# Altium PCB PCB1.PcbDoc
Units mil, origin at the board's own origin, x right, y up, seen from the top; angles counter-clockwise.
Board outline 3915 x 3520 mil, 4 copper layers (Top Layer, Layer 1, Layer 2, Bottom Layer), stack 23.756 mil thick; 28 components, 11 nets, 71 pads, 833 vias.
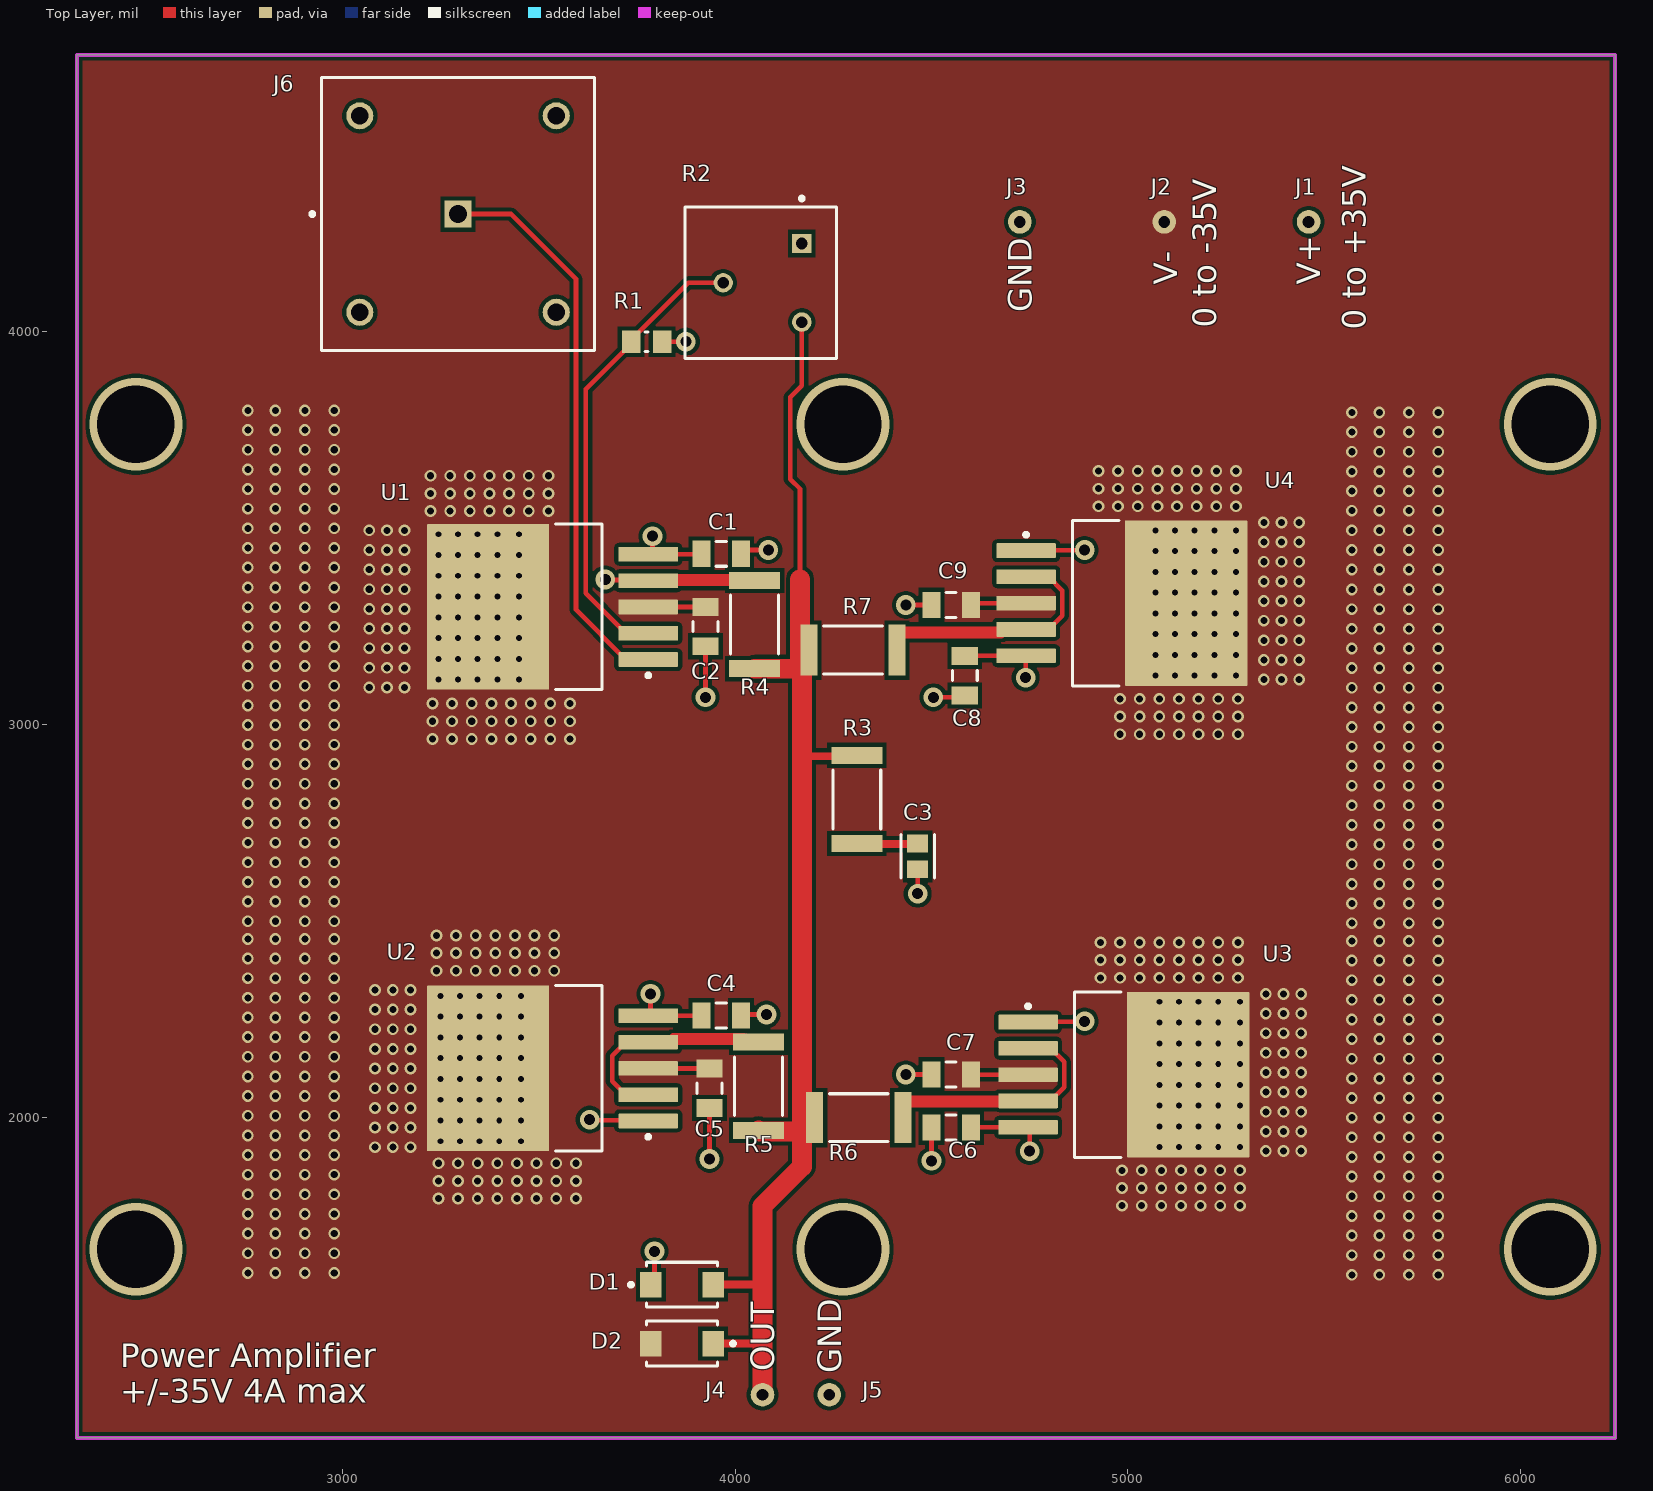
[diagram p0: Top Layer view]
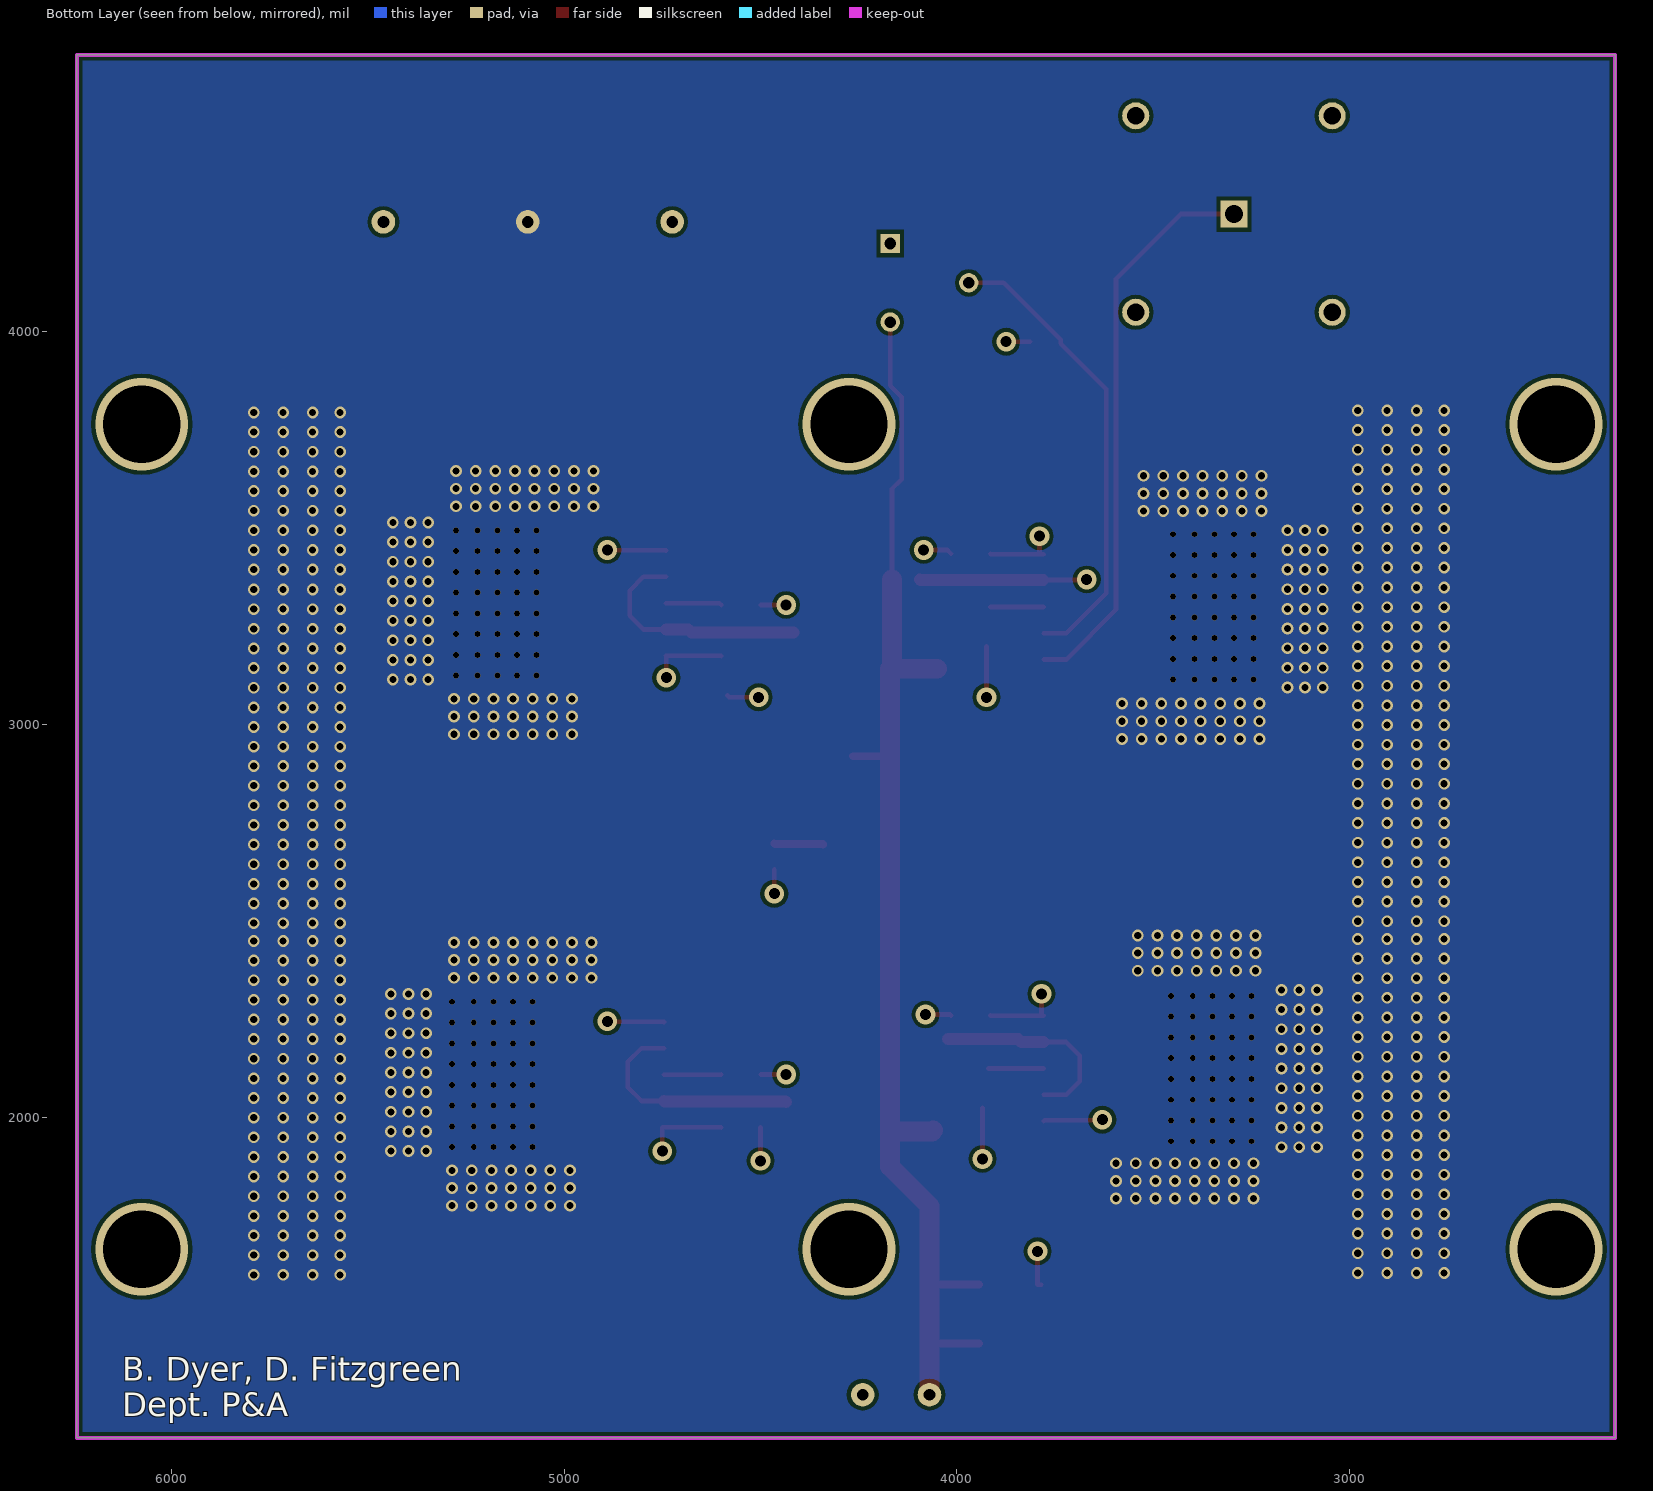
[diagram p1: Bottom Layer view, seen from below]
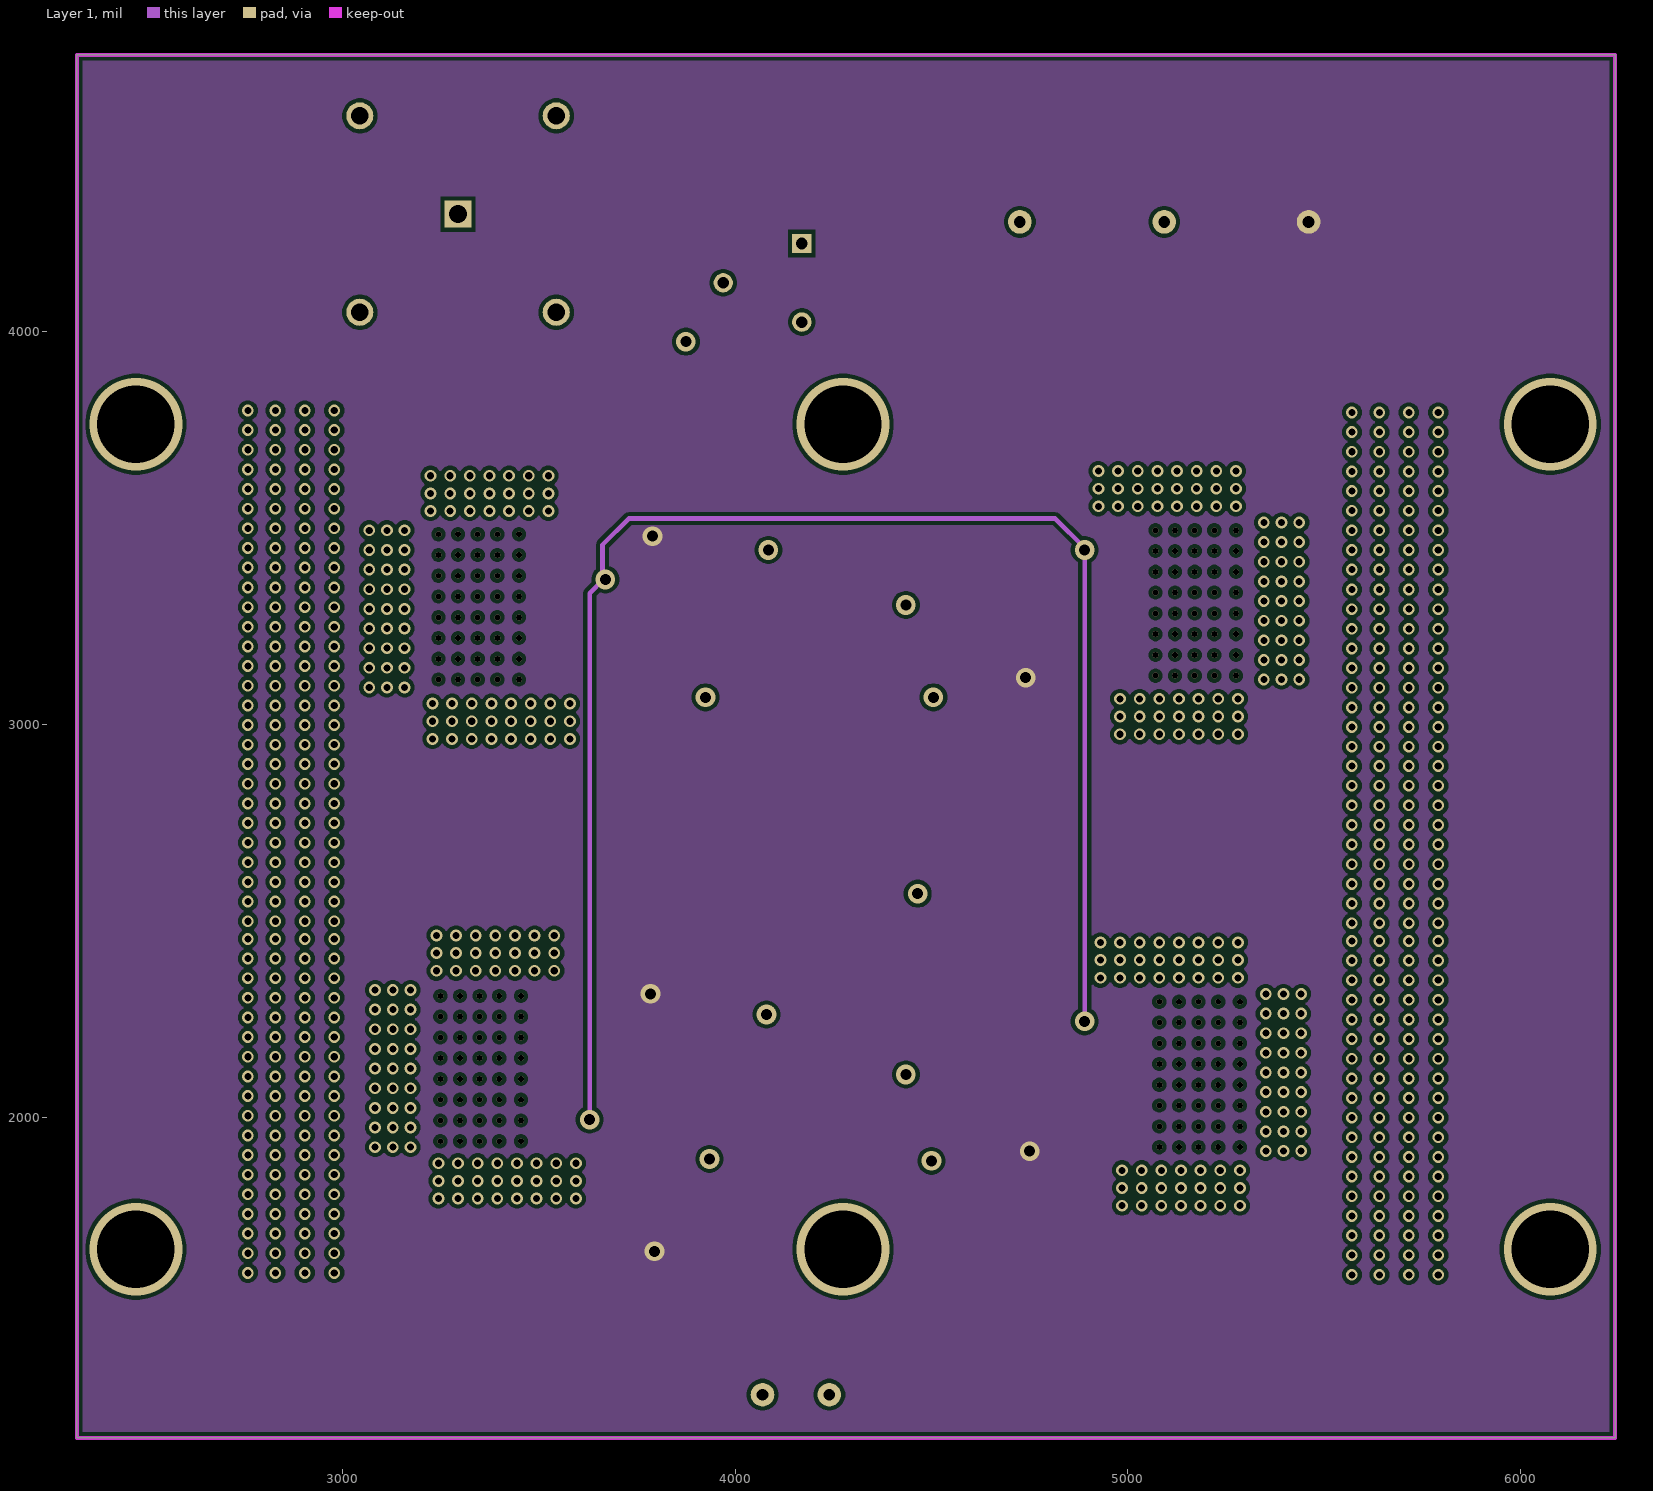
[diagram p2: Layer 1]
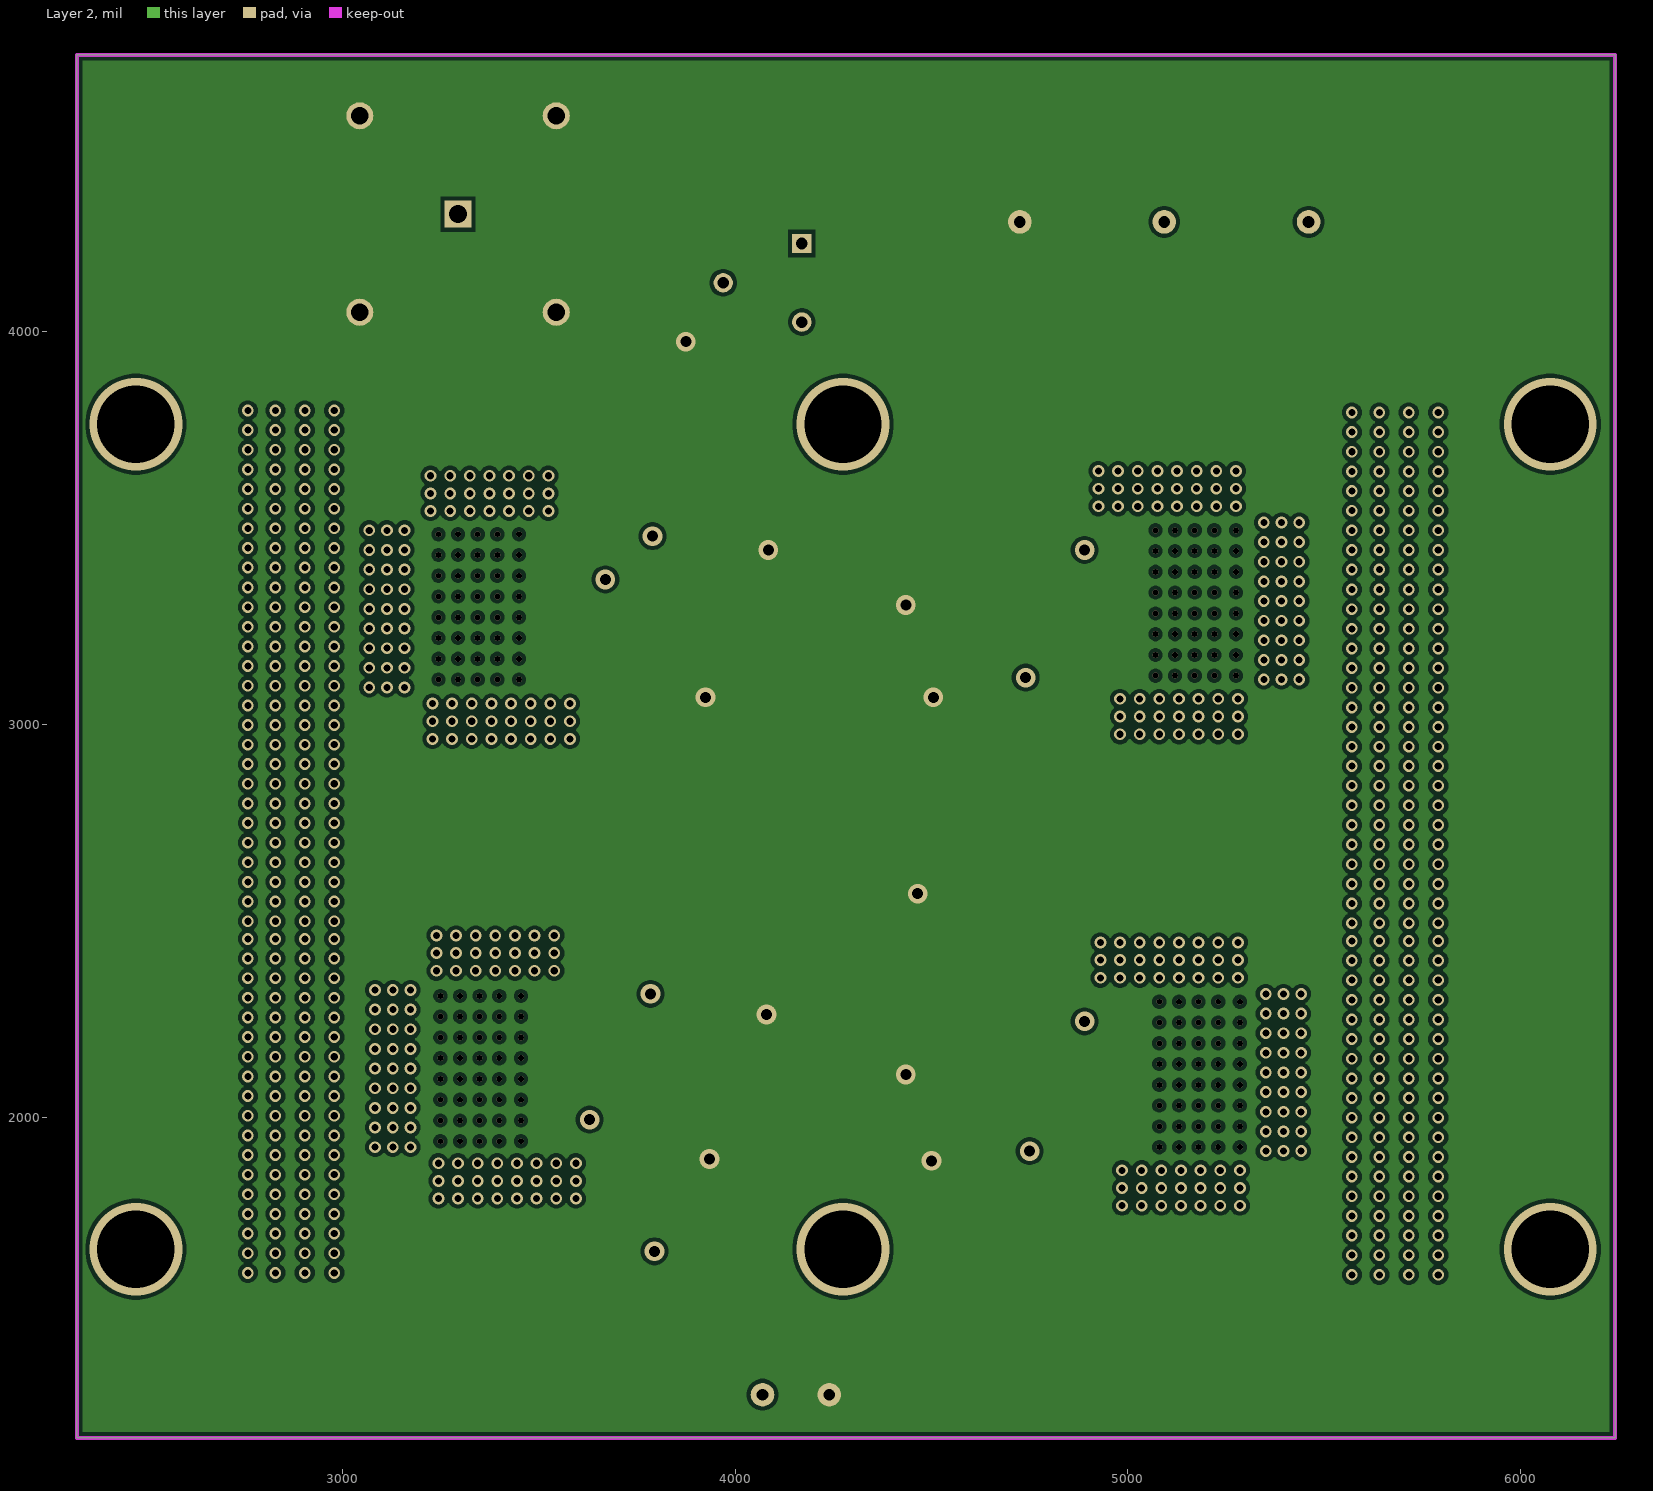
[diagram p3: Layer 2]
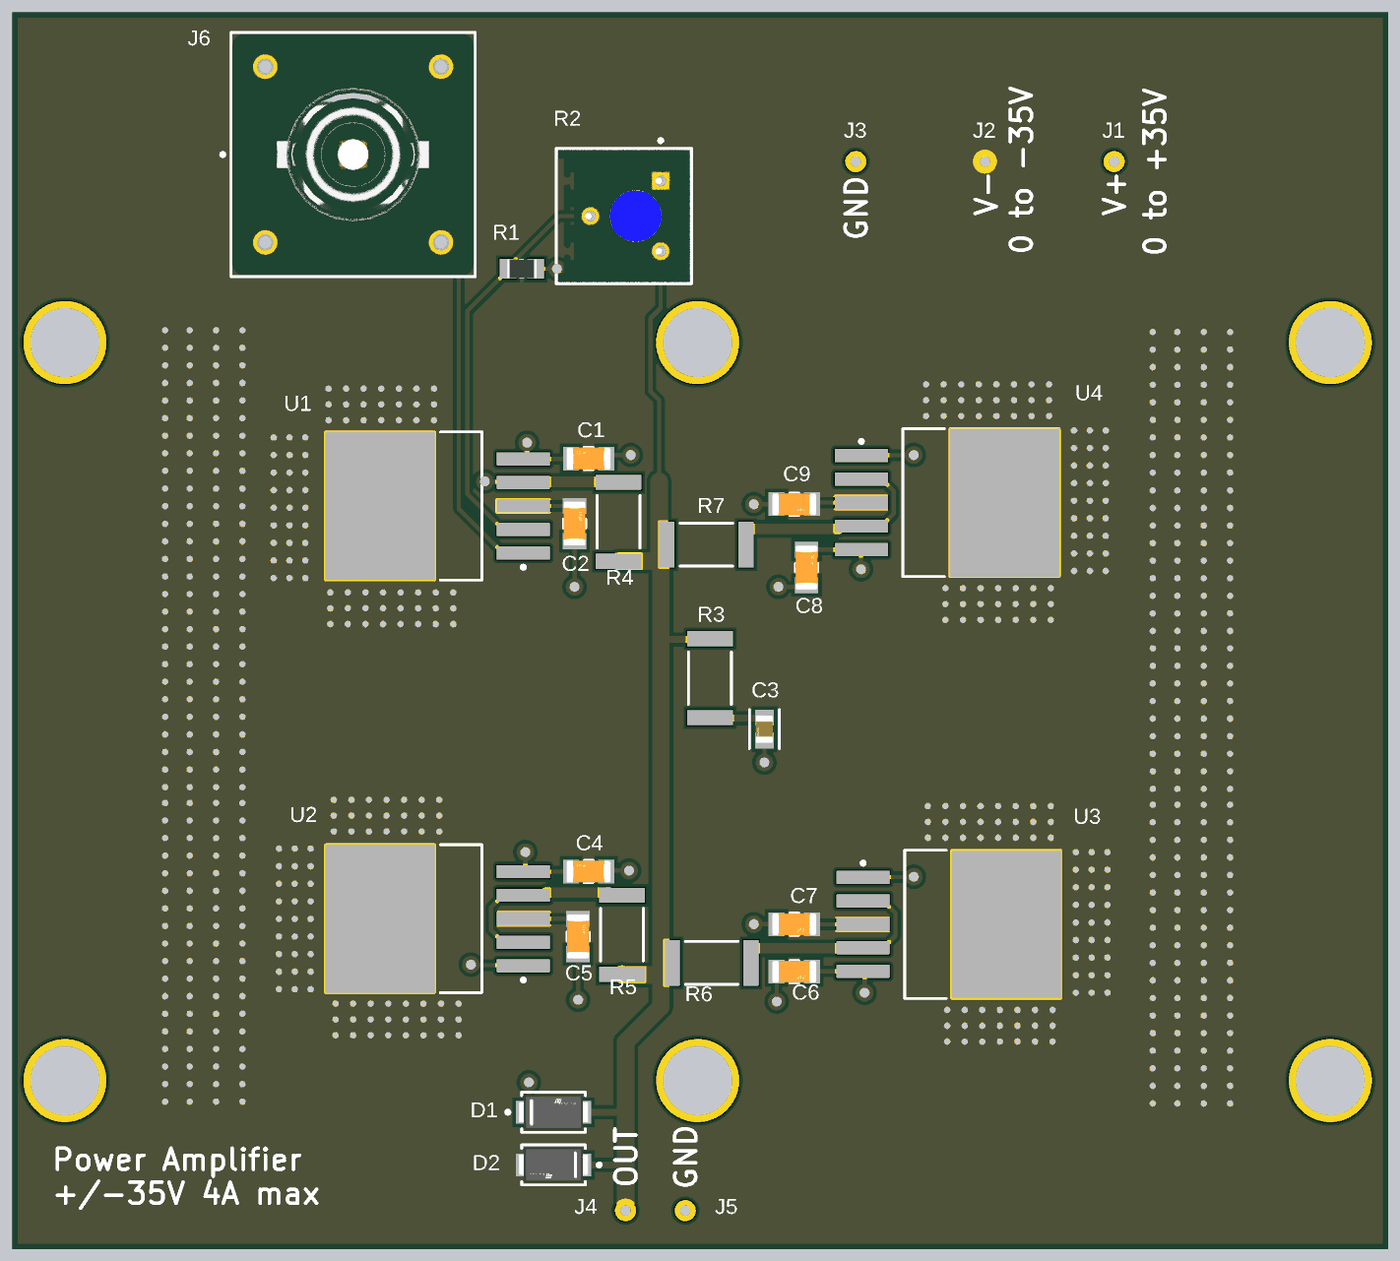
[diagram p4: 3D render of the assembled board from above, using the file's embedded part models]

## Layer stack, top to bottom
Top Solder: solder mask 0.4, Solder Resist, Dk 3.5
Top Layer: signal copper 1.4
Dielectric 2: prepreg 2.8, PP-006, Dk 4.1
Layer 1: signal copper 1.378
Dielectric 1: dielectric 12.6, FR-4, Dk 4.8
Layer 2: signal copper 1.378
Dielectric 3: prepreg 2.8, PP-006, Dk 4.1
Bottom Layer: signal copper 1.4
Bottom Solder: solder mask 0.4, Solder Resist, Dk 3.5

## Board outline
2325,1185 2325,4705 6240,4705 6240,1185

## Design rules (kind name [scope] priority, off if disabled: settings)
Clearance [All] p1: gap=10 ignorepadtopadclearanceinfootprint=FALSE except(0: Arc-Hole Track-Hole SMDPad-Hole THPad-Hole Via-Hole Fill-Hole Poly-Hole Region-Hole Text-Hole)
HoleSize [All] p1: absolutevalues=TRUE maxlimit=100 minlimit=14 maxpercent=80.000 minpercent=20.000
PolygonConnect [All] p1: connectstyle=Direct reliefconductorwidth=10 reliefentries=4 polygonreliefangle="90 Angle" airgapwidth=10
RoutingVias [All] p1: holewidth=28 width=50 viastyle="Through Hole" minholewidth=15 minwidth=15 maxholewidth=196.85 maxwidth=236.22
SolderMaskExpansion [All] p1: expansion=4 istentingtop=FALSE
Width [All] p1: maxlimit=100 minlimit=10 preferedwidth=12 minimp=50.000000 maximp=50.000000 favimp=50.000000
29 further rules are at their usual default settings.

## Components (designator, comment, footprint, x,y, rotation, side; value= is the part's Value field where it differs from the comment)
C1 "10u 50V" FP-CL31-IPC_C 3965,3435 r0 top value=10uF
C2 "10u 50V" FP-CL31-IPC_C 3925,3250 r270 top value=10uF
C3 "10n, 50V" FP-GRM219-0_1-IPC_B 4465,2665 r270 top
C4 "10u 50V" FP-CL31-IPC_C 3965,2260 r0 top value=10uF
C5 "10u 50V" FP-CL31-IPC_C 3935,2075 r270 top value=10uF
C6 "10u 50V" FP-CL31-IPC_C 4550,1975 r180 top value=10uF
C7 "10u 50V" FP-CL31-IPC_C 4550,2110 r180 top value=10uF
C8 "10u 50V" FP-CL31-IPC_C 4585,3125 r270 top value=10uF
C9 "10u 50V" FP-CL31-IPC_C 4550,3305 r180 top value=10uF
D1 "STPS1H100A" FP-SMA-MFG 3865,1575 r0 top
D2 "STPS1H100A" FP-SMA-MFG 3865,1425 r180 top
J1 "Banana" PCBComponent_1 5460,4280 r0 top
J2 "Banana" PCBComponent_1 5092.5,4280 r0 top
J3 "Banana" PCBComponent_1 4725,4280 r0 top
J4 "Banana" PCBComponent_1 4070,1295 r180 top
J5 "Banana" PCBComponent_1 4240,1295 r180 top
J6 "5227699-1" FP-5227699-1-MFG 3295,4300 r0 top
R1 "1K" RESC2013X60X35ML10T20 3775,3975 r180 top
R2 "30k" FP-3386F-MFG 4065.47,4125 r270 top value=30kΩ
R3 "3W" RESC6332 4310,2810 r90 top value=1R
R4 "3W" RESC6332 4050,3255 r270 top value=1R
R5 "3W" RESC6332 4060,2080 r270 top value=1R
R6 "3W" RESC6332 4315,2000 r180 top value=1R
R7 "3W" RESC6332 4300,3190 r180 top value=1R
U1 "OPA544F/500" KTT0005A_L 3535,3300 r180 top
U2 "OPA544F/500" KTT0005A_L 3535,2125.43 r180 top
U3 "OPA544F/500" KTT0005A_L 4990,2109.57 r0 top
U4 "OPA544F/500" KTT0005A_L 4985,3309.57 r0 top

## Footprints (in the part's own frame and the unit in brackets; to place one, negate y for a bottom-side part, rotate by r counter-clockwise, add the part's x,y. Pads: shape width x height; smd on the part's side, far side on the other; paste and mask are expansions set on the pad)
FP-3386F-MFG [mm]
  rect 1.25x1.25 hole 0.75 paste-1000 mask+0: 1(-2.54,2.655)
  round 1.25 hole 0.75 paste-1000 mask+0: 2(0,-2.425) 3(2.54,2.655)
  silkscreen extent -5.57,-4.89 4.89,4.89, body extent -4.99,-4.99 4.99,4.99, height 0.25
FP-5227699-1-MFG [mm]
  rect 1.75x1.75 hole 1.15 paste-1000 mask+0: 1(0,0)
  round 1.75 hole 1.15 paste-1000 mask+0: 2(-6.35,6.35) 3(6.35,6.35) 4(-6.35,-6.35) 5(6.35,-6.35)
  silkscreen extent -9.55,-8.82 8.82,8.82, body extent -8.93,-8.93 8.93,8.93, height 0.25
FP-CL31-IPC_C [mil]
  rect 45.45x67.17 smd paste+0 mask+0: 1(-50.23,0) 2(50.23,0)
  silkscreen extent -13,-31 13,31, body extent -77,-39 77,39, height 10
FP-GRM219-0_1-IPC_B [mil]
  rect 45.58x53.63 smd paste+0 mask+0: 1(-32.57,0) 2(32.57,0)
  silkscreen extent -55,-43 55,43, body extent -65,-37 65,37, height 10
FP-SMA-MFG [mm]
  rect 1.4x1.64 smd paste+0 mask+0: 1(-2.015,0) 2(2.015,0)
  silkscreen extent -3.42,-1.45 2.3,1.45, body extent -2.82,-1.55 2.82,1.55, height 0.25
KTT0005A_L [mm] "DPAK, 5-Leads, Body 10.65x9.65mm, Pitch 1.7mm, IPC High Density"
  rrect11% 3.85x0.95 smd: 1(-6.2,3.4) 2(-6.2,1.7) 3(-6.2,0) 4(-6.2,-1.7) 5(-6.2,-3.4)
  rrect1% 7.9x10.7 smd: 6(4.15,0)
  silkscreen extent -6.33,-5.35 -0.2,5.35, body extent -3.2,-5.32 6.45,5.33, height 4.83
PCBComponent_1 [mil]
  round 60 hole 30: 1(0,0)
RESC2013X60X35ML10T20 [mm] "Chip Resistor, 2-Leads, Body 2.1x1.35mm, IPC Low Density"
  rect 1.2x1.45 smd: 1(-1,0) 2(1,0)
  silkscreen extent -0.1,-0.63 0.1,0.63, body extent -1.05,-0.68 1.05,0.67, height 0.6
RESC6332 [mm] "Chip Resistor, Body 6.3x3.2mm, IPC High Density"
  rect 1.1x3.3 smd: 1(-2.85,0) 2(2.85,0)
  silkscreen extent -1.9,-1.55 1.9,1.55, body extent -3.22,-1.68 3.22,1.68, height 0.9

## Part data
C1 C2 C4 C5 C6 C7 C8 C9: library part CMP-13271-000016-1, "CAP CER 10UF 50V X5R 1206", Capacitance=10uF, Manufacturer=Samsung, Manufacturer Part Number=CL31A106KBHNNNE, Package=CL31, Temperature="-55°C to +85°C", Temperature Characteristic=X5R, Temperature Coefficient=15%, Temperature Range High=+85°C, Temperature Range Low=-55°C, Tolerance=10%, Voltage=50V, Automotive=No, Category=Cap, ComponentLink2Description=Datasheet, ComponentLink2URL=http://www.samsungsem.com/kr/support/product-search/mlcc/__icsFiles/afieldfile/2018/06/21/CL31A106KBHNNNE.pdf, Device Class L1="Passive Components", Device Class L2=Capacitors, Device Class L3="Ceramic Capacitors", Digikey Description="CAP CER 10UF 50V X5R 1206", Height=1.8mm, Ipc Land Pattern Name=CAPC320160X160, Lead Free=Yes, Material=Ceramic, Octopart=https://octopart.com/cl31a106kbhnnne-samsung-19832778, RoHS=TRUE, Voltage Rating=50V
C3: library part CMP-2007-00135-2, "Chip Multilayer Ceramic Capacitors for General Purpose, 0805, 10000pF, C0G, 30ppm/°C, 5%, 50V", Capacitance=10nF, Case Code (Imperial)=0805, Case Code (Metric)=2012, Dielectric=C0G, Dielectric Material=Ceramic, Insulation Resistance=10GR, Max Operating Temperature=125°C, Min Operating Temperature=-55°C, Package Quantity=1, Temperature Coefficient=30ppm/°C, Tolerance=5%, Voltage=50V, Case/Package=0805, Depth=1.25mm, Height=0.85mm, Lead Free="Lead Free", Length=2mm, Material=Ceramic, Mount="Surface Mount", Number of Pins=2, Packaging="Tape and Reel", Radiation Hardening=No, REACH SVHC="No SVHC", Termination=SMD/SMT, Thickness=0.037inch, Voltage Rating=50V, Voltage Rating (DC)=50V, Width=0.049inch
D1 D2: library part CMP-2000-07173-2, "DIODE SCHOTTKY 100V 1A SMA", Forward Current=1A, Manufacturer=STMicroelectronics, Max Junction Temp=+175°C, Max Repetitive Reverse Voltage=100V, Max Surge Forward Current=50A, Package=SMA, Peak Reverse Current=4uA, Temperature="to +175°C", Automotive=No, Category=Diode, ComponentLink2Description=Datasheet, ComponentLink2URL=https://www.st.com/resource/en/datasheet/stps1h100.pdf, Device Class L1="Discrete Semiconductors", Device Class L2=Diodes, Device Class L3="Schottky Diodes", Digikey Description="DIODE SCHOTTKY 100V 1A SMA", Height=2.65mm, Lead Free=Yes, Manufacturer Part Number=STPS1H100A, Mouser Description="Schottky Diodes & Rectifiers 1.0 Amp 100 Volt", Octopart=https://octopart.com/stps1h100a-stmicroelectronics-55399361, RoHS=TRUE, Standoff Height=0.05mm, Temperature Range High=+175°C
J1 J2 J3 J4 J5: library part Component_1
J6: library part CMP-03357-000003-1, "CONN BNC JACK STR 50 OHM PCB", Frequency=4GHz, Insulation Resistance=5GR, Max Operating Temperature=85°C, Min Operating Temperature=-55°C, Package Quantity=30, Voltage Rating=500V, Body Material=Zinc, Body Plating=Nickel, Connector Type=BNC, Contact Material=Bronze, Contact Plating=Silver, Depth=17.45mm, ELV=Compliant, Fastening Type=Bayonet, Gender=Female, Impedance=50R, Lead Free="Lead Free", Length=17.45mm, Max Frequency=4GHz, Mount="Through Hole", Number of Positions=1, Orientation=Straight, Packaging=Rail/Tube, PCB Mount Retention=Without, PCB Mounting Orientation=Vertical, Polarity=Standard, Radiation Hardening=No, Sealable="No (Without)", Termination=Solder
R1: library part CMP-2100-03671-1, "Chip Resistor, 1 KOhm, +/- 1%, 125 mW, -55 to 155 degC, 0805 (2012 Metric), RoHS, Tape and Reel", Case Code (Imperial)=0805, Case Code (Metric)=2012, Manufacturer=Yageo, Max Operating Temperature=155degC, Max Power Dissipation=125mW, Min Operating Temperature=-55degC, Package Description="2-Pin Surface Mounted Device, Body 2 x 1.25 mm", Package Quantity=1, Resistance=1KOhm, Temperature Coefficient=100ppm/degreesC, Tolerance=1%, Voltage Rating=150V, Case/Package=0805, Composition=ThickFilm, Datasheet URL=http://www.yageo.com/NewPortal/yageodocoutput?fileName=/pdf/R-Chip/PYu-RC_Group_51_RoHS_L_5.pdf, Datasheet Version="Rev. 5, 10/2016", Depth=1.25mm, Height=0.024inch, Lead Free=LeadFree, Length=0.079inch, Manufacturer URL=http://www.yageo.com/, Military Standard=Not, Number of Pins=2, Number of Terminations=2, Package Reference=0805, Packaging=TapeandReel, Power Rating=125mW, REACH SVHC=Unknown, RoHSCompliant=true, Termination=SMD/SMT, Voltage Rating (DC)=150V, Width=0.049inch
R2: library part CMP-07234-000018-1, "TRIMMER 30K OHM 0.5W PC PIN TOP", Manufacturer=Bourns, Manufacturer Part Number=3386F-1-303LF, Package=3386F, Power Rating=0.5W, Resistance=30kΩ, Temperature="-55°C to +125°C", Temperature Coefficient=100ppm/°C, Temperature Range High=+125°C, Temperature Range Low=-55°C, Tolerance=10%, Voltage Rating=300V, Automotive=No, Category=Res, ComponentLink2Description=Datasheet, ComponentLink2URL=https://www.bourns.com/docs/Product-Datasheets/3386.pdf, Composition=Cermet, Device Class L1="Passive Components", Device Class L2=Resistors, Device Class L3="Variable Resistors and Potentiometers", Digikey Description="TRIMMER 30K OHM 0.5W PC PIN TOP", Height=5.08mm, Lead Free=Yes, Mouser Description="Trimmer Resistors - Through Hole 3/8 30Kohms 10% 0.5Watts Square", Octopart=https://octopart.com/3386f-1-303lf-bourns-1032328, RoHS=TRUE, Series=3386, Standoff Height=0.38mm
R3 R4 R5 R6 R7: library part Res1, "Resistor", Supplier Part Number 1=RHC2512FT1R00, LatestRevisionDate=17-Jul-2002, LatestRevisionNote="Re-released for DXP Platform.", PackageDescription="Axial Device, Thru-Hole; 2 Leads; 0.3 in Pin Spacing", PackageReference=AXIAL-0.3, Published=8-Jun-2000, Publisher="Altium Limited", Supplier 1=Avnet
U1 U2 U3 U4: library part CMP-0272-03687-3, "High-Voltage, High-Current Operational Amplifier, 20 to 70 V, -40 to 85 degC, 5-pin DPAK (KTT5), Green (RoHS & no Sb/Br)", Manufacturer="Texas Instruments", Rating=Catalog, Total Supply Voltage(Max)(+5V is 5, +/-5V is 10)=70, Total Supply Voltage(Min)(+5V is 5, +/-5V is 10)=20, CMRR(Min)(dB)=90, Code_JEDEC=TO-263, ComponentLink1Description="Manufacturer URL", ComponentLink1URL=http://www.ti.com/, ComponentLink2Description=Datasheet, ComponentLink2URL=http://www.ti.com/lit/ds/symlink/opa544.pdf, ComponentLink3Description="Package Specification", ComponentLink3URL=http://www.ti.com/litv/pdf/mpsf007e, DatasheetVersion=SBOS038, Eco-Plan="Green (RoHS & no Sb/Br)", GBW(Typ)(MHz)=1.4, IIB(Max)(pA)=100, Iq per channel(Max)(mA)=15, Mounting Technology="Surface Mount", Number Of Channels=1, Offset Drift(Typ)(uV/C)=10, PackageDescription="3-Pin Plastic Flange Mount, Body 10.16 x 10.34 mm, Pitch 1.7 mm", PackageReference=KTT0005A, PackageVersion="4200577-3/F, 07/2011", Packing="LARGE T&R", PartNumber=OPA544F/500, Slew Rate(Typ)(V/us)=8, Sub Family="High Output Current Amplifier (>=50mA), High Supply Voltage Amplifier (>=30V), Precision Amplifier", Vio (25C)(Max)(mV)=5

## Via types
v1: diameter 30, hole 18, Top Layer to Bottom Layer, tented both sides, 648 vias
v2: diameter 15, hole 15, Top Layer to Bottom Layer, 160 vias
v3: diameter 50, hole 28, Top Layer to Bottom Layer, tented both sides, 19 vias
v4: diameter 236.22, hole 196.85, Top Layer to Bottom Layer, 6 vias

## Nets (pads, with @x,y where several pads share a name; then routed paths per layer and width w, separated by ;. In a path a pad name is that pad's centre, name@x,y a point inside that pad or via, vN(x,y) a via of type N, cw(c..) or ccw(c..) an arc to the next point about the centre after c; other vN are vias at no path point)
Amp_in: J6.1 U1.1 | length 1446.9
  Top Layer w12: J6.1 3430,4300 3595.45,4134.55 3595.45,3292.7 3722.01,3166.14 U1.1
Amp_out: D1.2 D2.1 J4.1 R2.3 R3.2 R4.2 R5.2 R6.2 R7.2 | length 3366.3
  Top Layer w12: 4165.43,3370 4165.43,3600.61 4140.89,3625.15 4140.89,3834.2 4170,3863.31 R2.3
  Top Layer w20: D2.1 4070,1425 ; D1.2 4070,1575 ; 4170.43,2920 R3.2@4264.57,2920
  Top Layer w50: R4.2 4165.43,3142.8 4165.43,3370 ; R5.2 4062.8,1965 4170.43,1965 ; J4.1 4070,1425 4070,1575 4070,1775 4170.43,1875.43 4170.43,1965 ; R7.2@4170.43,3142.8 4170.43,2920 4170.43,2040 4170.43,1965
Follow: R4.1 U1.4 U2.1 U3.1 U4.1 | length 4848.4
  Top Layer w12: v3(3630,1995) 3631.71,1993.29 3777.38,1993.29 U2.1 ; v3(3670,3370) 3671.54,3368.46 3777.56,3368.46 U1.4 U1.4@3780.63,3368.46 ; U4.1 4741.69,3444.21 4889.21,3444.21 v3(4890,3445) ; U3.1 4746.69,2244.21 4889.21,2244.21 v3(4890,2245)
  Top Layer w30: U1.4@3780.63,3368.46 4093.03,3368.46 R4.1@4094.57,3370
  Layer 1 w12: v3(3630,1995) 3630,3334.72 3665.28,3370 v3(3670,3370) 3662.73,3377.27 3662.73,3457.73 3730,3525 4815,3525 4890,3450 v3(4890,3445) v3(4890,2245)
GND: C1.2 C2.2 C3.2 C4.2 C5.2 C6.2 C7.2 C8.2 C9.2 J3.1 J5.1 J6.2 J6.3 J6.4 J6.5 R1.1 | length 818.9
  Top Layer w12: R1.1 v3(3875,3975) ; v3(3925,3070) C2.2 ; v3(3935,1895) C5.2 ; C4.2 4017.79,2262.56 v3(4080,2262.56) ; C1.2 4025.23,3445 v3(4085,3445) ; v3(4435,2110) C7.2 ; v3(4435,3305) C9.2 ; v3(4465,2570) C3.2 ; C6.2 4500,1974.77 v3(4500,1890) ; v3(4505,3070) 4580.23,3070 C8.2
NetC3_1: C3.1 R3.1 | length 125.6
  Top Layer w20: R3.1@4340.43,2695 4341.72,2696.28 4463.72,2696.28 C3.1
NetR1_2: R1.2 R2.2 U1.2 | length 1188.5
  Top Layer w12: U1.2 3722.01,3233.07 3620,3335.08 3620,3854.45 3735.63,3970.08 R1.2 3735.63,3979.92 3880.71,4125 R2.2
NetR5_1: R5.1 U2.2 U2.4 | length 523.6
  Top Layer w12: U2.2 3722.01,2058.5 3687.31,2093.2 3687.31,2157.66 3722.01,2192.36 U2.4
  Top Layer w30: U2.4 3836.18,2192.36 3843.82,2200 R5.1@4022.8,2200
NetR6_1: R6.1 U3.2 U3.4 | length 588.8
  Top Layer w12: U3.4 4802.99,2042.64 4837.69,2077.34 4837.69,2141.8 4802.99,2176.5 U3.2
  Top Layer w30: R6.1@4435,2040 4436.32,2041.32 4744.59,2041.32 U3.4
NetR7_1: R7.1 U4.2 U4.4 | length 605.4
  Top Layer w12: U4.4 4797.99,3242.64 4832.69,3277.34 4832.69,3341.8 4797.99,3376.5 U4.2
  Top Layer w30: R7.1@4415.43,3235 4676.18,3235 4683.82,3242.64 U4.4
V+: C1.1 C4.1 C6.1 C8.1 D1.1 J1.1 U1.5 U2.5 U3.5 U4.5 | length 875.7
  Top Layer w12: U2.5 U2.5@3785,2259.29 ; U1.5 U1.5@3790,3433.86 ; v3(3785,2315) U2.5@3785,2259.29 ; D1.1 3795,1575 v3(3795,1660) ; v3(3790,3480) U1.5@3790,3433.86 ; C4.1 3914.06,2259.29 U2.5@3785,2259.29 ; C1.1 3913.63,3433.86 U1.5@3790,3433.86 ; C6.1 4600.94,1975.71 U3.5 4750,1975.71 v3(4750,1915) ; C8.1@4600.23,3175 4600.94,3175.71 U4.5@4740,3175.71 ; v3(4740,3120) U4.5@4740,3175.71 ; U4.5 U4.5@4740,3175.71
V-: C2.1 C5.1 C7.1 C9.1 D2.2 J2.1 U1.3 U1.6 U2.3 U2.6 U3.3 U3.6 U4.3 U4.6 | length 564.9
  Top Layer w12: U2.3 3919.34,2125.43 C5.1@3919.77,2125 ; U1.3 C2.1@3914.77,3300 ; C7.1 4600.66,2109.57 U3.3 ; C9.1 4604.8,3309.57 U4.3
  other v1: 5570,1600 5640,1600 5715,1600 5790,1600 2760,1605 2830,1605 2905,1605 2980,1605 5570,1650 5640,1650 5715,1650 5790,1650 2760,1655 2830,1655 2905,1655 2980,1655 5570,1700 5640,1700 5715,1700 5790,1700 2760,1705 2830,1705 2905,1705 2980,1705 5570,1750 5640,1750 5715,1750 5790,1750 2760,1755 2830,1755 2905,1755 2980,1755 4985,1776.03 5035,1776.03 5085,1776.03 5135,1776.03 5185,1776.03 5235,1776.03 5285,1776.03 3245,1793.97 3295,1793.97 3345,1793.97 3395,1793.97 3445,1793.97 3495,1793.97 3545,1793.97 3595,1793.97 5570,1800 5640,1800 5715,1800 5790,1800 2760,1805 2830,1805 2905,1805 2980,1805 4985,1821.03 5035,1821.03 5085,1821.03 5135,1821.03 5185,1821.03 5235,1821.03 5285,1821.03 3245,1838.97 3295,1838.97 3345,1838.97 3395,1838.97 3445,1838.97 3495,1838.97 3545,1838.97 3595,1838.97 5570,1850 5640,1850 5715,1850 5790,1850 2760,1855 2830,1855 2905,1855 2980,1855 4985,1866.03 5035,1866.03 5085,1866.03 5135,1866.03 5185,1866.03 5235,1866.03 5285,1866.03 3245,1883.97 3295,1883.97 3345,1883.97 3395,1883.97 3445,1883.97 3495,1883.97 3545,1883.97 3595,1883.97 5570,1900 5640,1900 5715,1900 5790,1900 2760,1905 2830,1905 2905,1905 2980,1905 5351.03,1915 5396.03,1915 5441.03,1915 3083.97,1925 3128.97,1925 3173.97,1925 5570,1950 5640,1950 5715,1950 5790,1950 2760,1955 2830,1955 2905,1955 2980,1955 5351.03,1965 5396.03,1965 5441.03,1965 3083.97,1975 3128.97,1975 3173.97,1975 5570,2000 5640,2000 5715,2000 5790,2000 2760,2005 2830,2005 2905,2005 2980,2005 5351.03,2015 5396.03,2015 5441.03,2015 3083.97,2025 3128.97,2025 3173.97,2025 5570,2050 5640,2050 5715,2050 5790,2050 2760,2055 2830,2055 2905,2055 2980,2055 5351.03,2065 5396.03,2065 5441.03,2065 3083.97,2075 3128.97,2075 3173.97,2075 5570,2100 5640,2100 5715,2100 5790,2100 2760,2105 2830,2105 2905,2105 2980,2105 5351.03,2115 5396.03,2115 5441.03,2115 3083.97,2125 3128.97,2125 3173.97,2125 5570,2150 5640,2150 5715,2150 5790,2150 2760,2155 2830,2155 2905,2155 2980,2155 5351.03,2165 5396.03,2165 5441.03,2165 3083.97,2175 3128.97,2175 3173.97,2175 5570,2200 5640,2200 5715,2200 5790,2200 2760,2205 2830,2205 2905,2205 2980,2205 5351.03,2215 5396.03,2215 5441.03,2215 3083.97,2225 3128.97,2225 3173.97,2225 5570,2250 5640,2250 5715,2250 5790,2250 2760,2255 2830,2255 2905,2255 2980,2255 5351.03,2265 5396.03,2265 5441.03,2265 3083.97,2275 3128.97,2275 3173.97,2275 5570,2300 5640,2300 5715,2300 5790,2300 2760,2305 2830,2305 2905,2305 2980,2305 5351.03,2315 5396.03,2315 5441.03,2315 3083.97,2325 3128.97,2325 3173.97,2325 5570,2350 5640,2350 5715,2350 5790,2350 2760,2355 2830,2355 2905,2355 2980,2355 4930,2356.03 4980,2356.03 5030,2356.03 5080,2356.03 5130,2356.03 5180,2356.03 5230,2356.03 5280,2356.03 3240,2373.97 3290,2373.97 3340,2373.97 3390,2373.97 3440,2373.97 3490,2373.97 3540,2373.97 5570,2400 5640,2400 5715,2400 5790,2400 4930,2401.03 4980,2401.03 5030,2401.03 5080,2401.03 5130,2401.03 5180,2401.03 5230,2401.03 5280,2401.03 2760,2405 2830,2405 2905,2405 2980,2405 3240,2418.97 3290,2418.97 3340,2418.97 3390,2418.97 3440,2418.97 3490,2418.97 3540,2418.97 4930,2446.03 4980,2446.03 5030,2446.03 5080,2446.03 5130,2446.03 5180,2446.03 5230,2446.03 5280,2446.03 5570,2450 5640,2450 5715,2450 5790,2450 2760,2455 2830,2455 2905,2455 2980,2455 3240,2463.97 3290,2463.97 3340,2463.97 3390,2463.97 3440,2463.97 3490,2463.97 3540,2463.97 5570,2495 5640,2495 5715,2495 5790,2495 2760,2500 2830,2500 2905,2500 2980,2500 5570,2545 5640,2545 5715,2545 5790,2545 2760,2550 2830,2550 2905,2550 2980,2550 5570,2595 5640,2595 5715,2595 5790,2595 2760,2600 2830,2600 2905,2600 2980,2600 5570,2645 5640,2645 5715,2645 5790,2645 2760,2650 2830,2650 2905,2650 2980,2650 5570,2695 5640,2695 5715,2695 5790,2695 2760,2700 2830,2700 2905,2700 2980,2700 5570,2745 5640,2745 5715,2745 5790,2745 2760,2750 2830,2750 2905,2750 2980,2750 5570,2795 5640,2795 5715,2795 5790,2795 2760,2800 2830,2800 2905,2800 2980,2800 5570,2845 5640,2845 5715,2845 5790,2845 2760,2850 2830,2850 2905,2850 2980,2850 5570,2895 5640,2895 5715,2895 5790,2895 2760,2900 2830,2900 2905,2900 2980,2900 5570.02,2944.34 5640.02,2944.34 5715.02,2944.34 5790.02,2944.34 2760.02,2949.34 2830.02,2949.34 2905.02,2949.34 2980.02,2949.34 3230,2963.97 3280,2963.97 3330,2963.97 3380,2963.97 3430,2963.97 3480,2963.97 3530,2963.97 3580,2963.97 4980,2976.03 5030,2976.03 5080,2976.03 5130,2976.03 5180,2976.03 5230,2976.03 5280,2976.03 5570.02,2994.34 5640.02,2994.34 5715.02,2994.34 5790.02,2994.34 2760.02,2999.34 2830.02,2999.34 2905.02,2999.34 2980.02,2999.34 3230,3008.97 3280,3008.97 3330,3008.97 3380,3008.97 3430,3008.97 3480,3008.97 3530,3008.97 3580,3008.97 4980,3021.03 5030,3021.03 5080,3021.03 5130,3021.03 5180,3021.03 5230,3021.03 5280,3021.03 5570.02,3044.34 5640.02,3044.34 5715.02,3044.34 5790.02,3044.34 2760.02,3049.34 2830.02,3049.34 2905.02,3049.34 2980.02,3049.34 3230,3053.97 3280,3053.97 3330,3053.97 3380,3053.97 3430,3053.97 3480,3053.97 3530,3053.97 3580,3053.97 4980,3066.03 5030,3066.03 5080,3066.03 5130,3066.03 5180,3066.03 5230,3066.03 5280,3066.03 5570.02,3094.34 5640.02,3094.34 5715.02,3094.34 5790.02,3094.34 3068.97,3095 3113.97,3095 3158.97,3095 2760.02,3099.34 2830.02,3099.34 2905.02,3099.34 2980.02,3099.34 5346.03,3115 5391.03,3115 5436.03,3115 5570.02,3144.34 5640.02,3144.34 5715.02,3144.34 5790.02,3144.34 3068.97,3145 3113.97,3145 3158.97,3145 2760.02,3149.34 2830.02,3149.34 2905.02,3149.34 2980.02,3149.34 5346.03,3165 5391.03,3165 5436.03,3165 5570.02,3194.34 5640.02,3194.34 5715.02,3194.34 5790.02,3194.34 3068.97,3195 3113.97,3195 3158.97,3195 2760.02,3199.34 2830.02,3199.34 2905.02,3199.34 2980.02,3199.34 5346.03,3215 5391.03,3215 5436.03,3215 5570.02,3244.34 5640.02,3244.34 5715.02,3244.34 5790.02,3244.34 3068.97,3245 3113.97,3245 3158.97,3245 2760.02,3249.34 2830.02,3249.34 2905.02,3249.34 2980.02,3249.34 5346.03,3265 5391.03,3265 5436.03,3265 5570.02,3294.34 5640.02,3294.34 5715.02,3294.34 5790.02,3294.34 3068.97,3295 3113.97,3295 3158.97,3295 2760.02,3299.34 2830.02,3299.34 2905.02,3299.34 2980.02,3299.34 5346.03,3315 5391.03,3315 5436.03,3315 5570.02,3344.34 5640.02,3344.34 5715.02,3344.34 5790.02,3344.34 3068.97,3345 3113.97,3345 3158.97,3345 2760.02,3349.34 2830.02,3349.34 2905.02,3349.34 2980.02,3349.34 5346.03,3365 5391.03,3365 5436.03,3365 3068.97,3395 3113.97,3395 3158.97,3395 5570,3395 5640,3395 5715,3395 5790,3395 2760,3400 2830,3400 2905,3400 2980,3400 5346.03,3415 5391.03,3415 5436.03,3415 3068.97,3445 3113.97,3445 3158.97,3445 5570,3445 5640,3445 5715,3445 5790,3445 2760,3450 2830,3450 2905,3450 2980,3450 5346.03,3465 5391.03,3465 5436.03,3465 3068.97,3495 3113.97,3495 3158.97,3495 5570,3495 5640,3495 5715,3495 5790,3495 2760,3500 2830,3500 2905,3500 2980,3500 5346.03,3515 5391.03,3515 5436.03,3515 3225,3543.97 3275,3543.97 3325,3543.97 3375,3543.97 3425,3543.97 3475,3543.97 3525,3543.97 5570,3545 5640,3545 5715,3545 5790,3545 2760,3550 2830,3550 2905,3550 2980,3550 4925,3556.03 4975,3556.03 5025,3556.03 5075,3556.03 5125,3556.03 5175,3556.03 5225,3556.03 5275,3556.03 3225,3588.97 3275,3588.97 3325,3588.97 3375,3588.97 3425,3588.97 3475,3588.97 3525,3588.97 5570,3595 5640,3595 5715,3595 5790,3595 2760,3600 2830,3600 2905,3600 2980,3600 4925,3601.03 4975,3601.03 5025,3601.03 5075,3601.03 5125,3601.03 5175,3601.03 5225,3601.03 5275,3601.03 3225,3633.97 3275,3633.97 3325,3633.97 3375,3633.97 3425,3633.97 3475,3633.97 3525,3633.97 5570,3645 5640,3645 5715,3645 5790,3645 4925,3646.03 4975,3646.03 5025,3646.03 5075,3646.03 5125,3646.03 5175,3646.03 5225,3646.03 5275,3646.03 2760,3650 2830,3650 2905,3650 2980,3650 5570,3695 5640,3695 5715,3695 5790,3695 2760,3700 2830,3700 2905,3700 2980,3700 5570,3745 5640,3745 5715,3745 5790,3745 2760,3750 2830,3750 2905,3750 2980,3750 5570,3795 5640,3795 5715,3795 5790,3795 2760,3800 2830,3800 2905,3800 2980,3800
  other v2: 5080,1925 5130,1925 5180,1925 5230,1925 5285,1925 3250,1940 3300,1940 3350,1940 3400,1940 3455,1940 5080,1977.86 5130,1977.86 5180,1977.86 5230,1977.86 5285,1977.86 3250,1992.86 3300,1992.86 3350,1992.86 3400,1992.86 3455,1992.86 5080,2030.71 5130,2030.71 5180,2030.71 5230,2030.71 5285,2030.71 3250,2045.71 3300,2045.71 3350,2045.71 3400,2045.71 3455,2045.71 5080,2083.57 5130,2083.57 5180,2083.57 5230,2083.57 5285,2083.57 3250,2098.57 3300,2098.57 3350,2098.57 3400,2098.57 3455,2098.57 5080,2136.43 5130,2136.43 5180,2136.43 5230,2136.43 5285,2136.43 3250,2151.43 3300,2151.43 3350,2151.43 3400,2151.43 3455,2151.43 5080,2189.29 5130,2189.29 5180,2189.29 5230,2189.29 5285,2189.29 3250,2204.29 3300,2204.29 3350,2204.29 3400,2204.29 3455,2204.29 5080,2242.14 5130,2242.14 5180,2242.14 5230,2242.14 5285,2242.14 3250,2257.14 3300,2257.14 3350,2257.14 3400,2257.14 3455,2257.14 5080,2295 5130,2295 5180,2295 5230,2295 5285,2295 3250,2310 3300,2310 3350,2310 3400,2310 3455,2310 3245,3115 3295,3115 3345,3115 3395,3115 3450,3115 5070,3125 5120,3125 5170,3125 5220,3125 5275,3125 3245,3167.86 3295,3167.86 3345,3167.86 3395,3167.86 3450,3167.86 5070,3177.86 5120,3177.86 5170,3177.86 5220,3177.86 5275,3177.86 3245,3220.71 3295,3220.71 3345,3220.71 3395,3220.71 3450,3220.71 5070,3230.71 5120,3230.71 5170,3230.71 5220,3230.71 5275,3230.71 3245,3273.57 3295,3273.57 3345,3273.57 3395,3273.57 3450,3273.57 5070,3283.57 5120,3283.57 5170,3283.57 5220,3283.57 5275,3283.57 3245,3326.43 3295,3326.43 3345,3326.43 3395,3326.43 3450,3326.43 5070,3336.43 5120,3336.43 5170,3336.43 5220,3336.43 5275,3336.43 3245,3379.29 3295,3379.29 3345,3379.29 3395,3379.29 3450,3379.29 5070,3389.29 5120,3389.29 5170,3389.29 5220,3389.29 5275,3389.29 3245,3432.14 3295,3432.14 3345,3432.14 3395,3432.14 3450,3432.14 5070,3442.14 5120,3442.14 5170,3442.14 5220,3442.14 5275,3442.14 3245,3485 3295,3485 3345,3485 3395,3485 3450,3485 5070,3495 5120,3495 5170,3495 5220,3495 5275,3495
pads on no net: R2.1
copper on no net:
  other v4: 2475,1665 4275,1665 6075,1665 2475,3765 4275,3765 6075,3765

## Polygon pours and split planes (outlines as drawn)
V- on Bottom Layer "Bottom Layer-V-" (solid, pour order 0): 2325,1185 2325,4705 6240,4705 6240,1185
no net on Bottom Solder (solid): 2680,3900 3855,3900 3855,2725 2680,2725
no net on Bottom Solder (solid): 2685,2700 3860,2700 3860,1525 2685,1525
no net on Bottom Solder (solid): 4670,2700 5845,2700 5845,1525 4670,1525
no net on Bottom Solder (solid): 4665,3905 5840,3905 5840,2730 4665,2730
V+ on Layer 1 "V+_L02_P001" (solid, pour order 1): 2325,1185 2325,4705 6240,4705 6240,1185
GND on Layer 2 "GND_L03_P002" (solid, pour order 2): 2325,1185 2325,4705 6240,4705 6240,1185
V- on Top Layer "V-_L01_P003" (solid, pour order 3): 2325,1185 2325,4705 6240,4705 6240,1185

## Keep-outs
Keep-Out Layer:
  the board outline again, w10

## Silkscreen, mask and mechanical layers (free items; w line width, h text height)
Top Overlay:
  text "V-" at 5125,4120 h60 r90
  text "V+" at 5490,4120 h60 r90
  text "GND" at 4755,4050 h60 r90
  text "0 to -35V" at 5225,4010 h60 r90
  text "0 to +35V" at 5605,4005 h60 r90
  text "OUT" at 4100,1355 h60 r90
  text "GND" at 4270,1350 h60 r90
  text "Power Amplifier / +/-35V 4A max" at 2435,1275 h60
Bottom Overlay:
  text "B. Dyer, D. Fitzgreen / Dept. P&A" at 6125,1240 h60
Mechanical 2:
  lines w10: 1975,1515 6575,1515 6575,3915 1975,3915 1975,1515 ; 2680,1520 3861.1,1520 3861.1,2701.1 2680,2701.1 2680,1520 ; 2680,2725 3861.1,2725 3861.1,3906.1 2680,3906.1 2680,2725 ; 4665,1520 5846.1,1520 5846.1,2701.1 4665,2701.1 4665,1520 ; 4665,2725 5846.1,2725 5846.1,3906.1 4665,3906.1 4665,2725